# EAGLE board atmegademo1 (EAGLE 7.0.0)
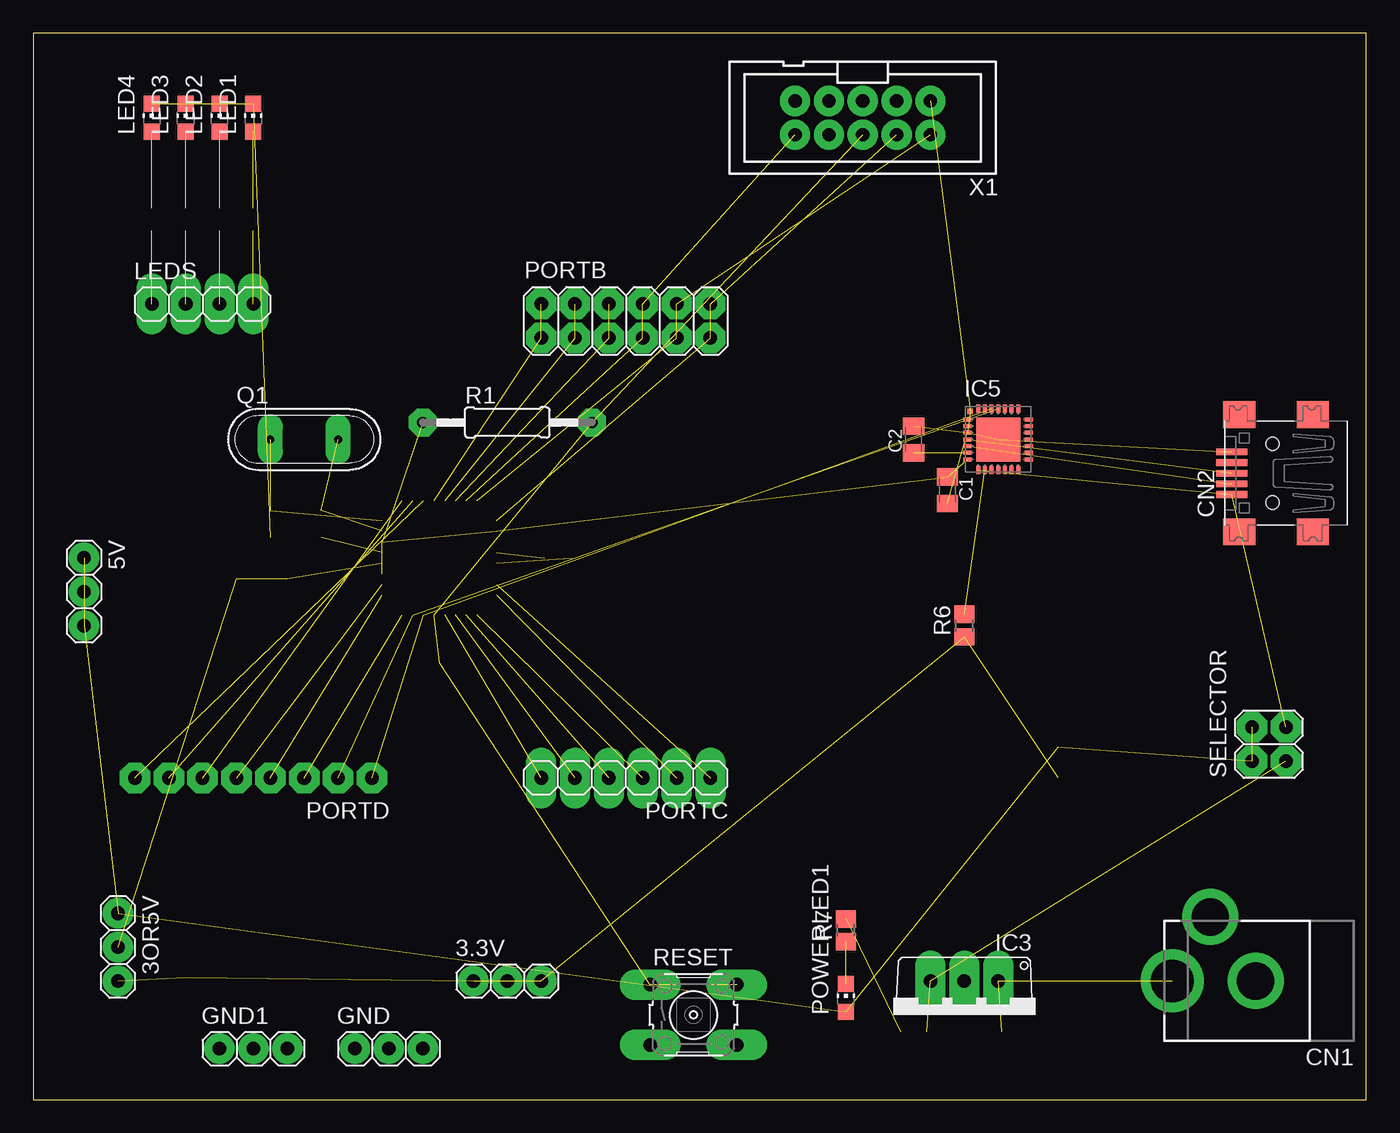
[diagram p0: board, top side]
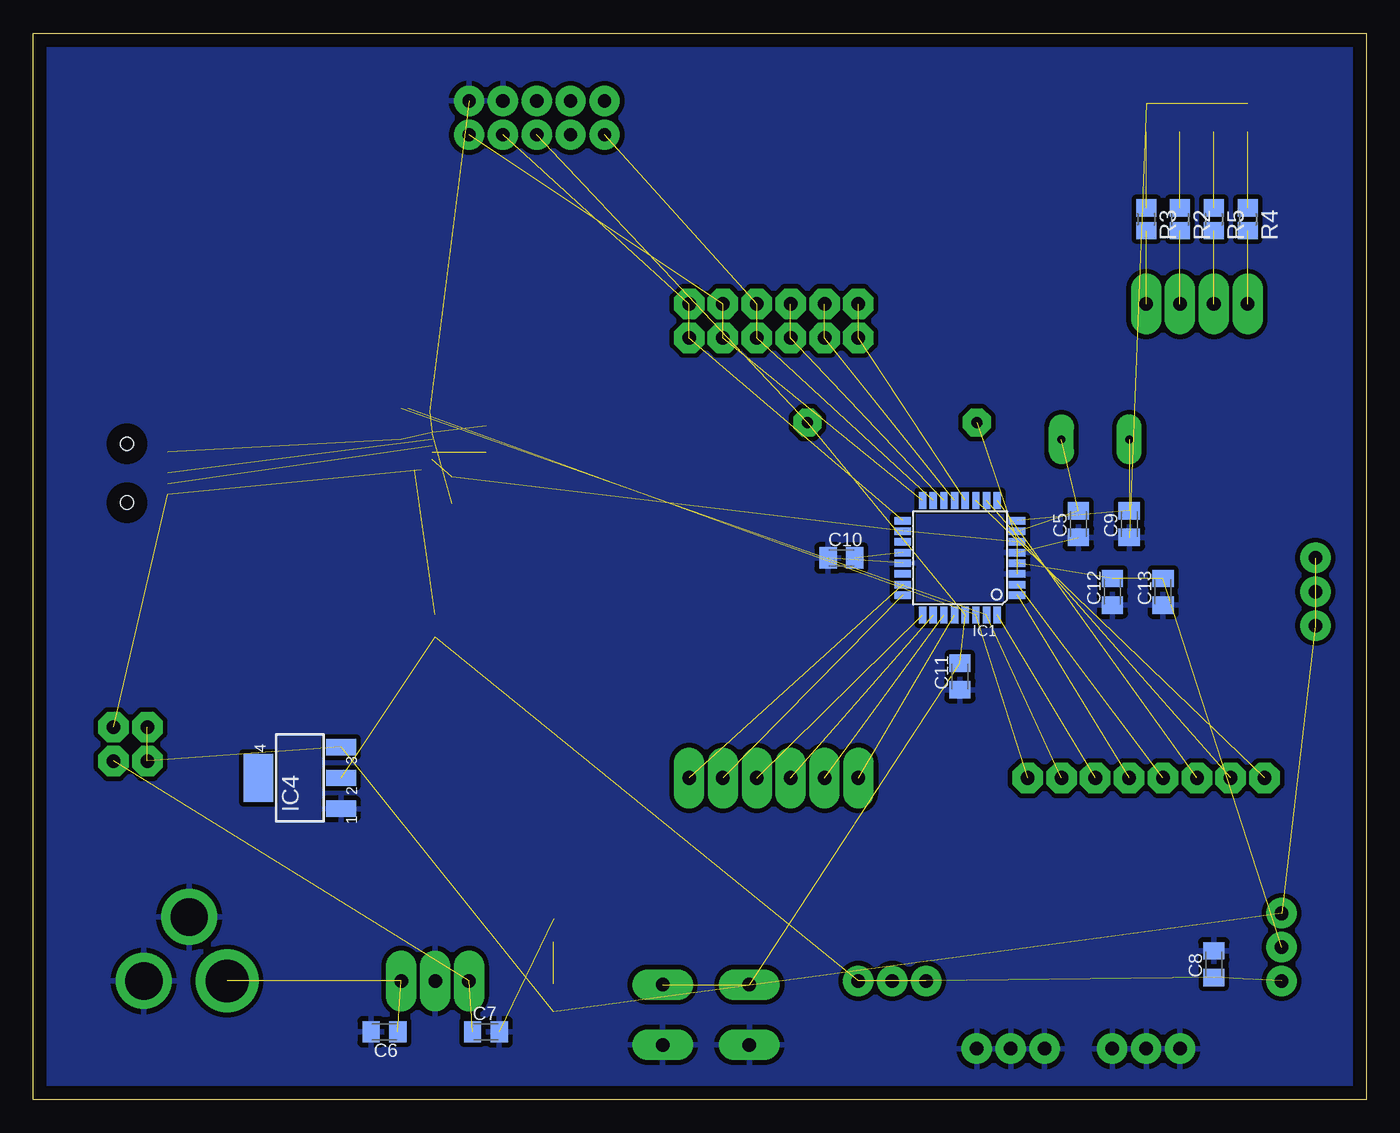
[diagram p1: board, bottom side, seen from below]

Size 100 x 80 mm. Coordinates in mm from the lower left corner, seen from the top.
Outline: 0,0 100,0 100,80 0,80 0,0
Copper layers (1*16): Top 0.035mm / dielectric 1.5mm / Bottom 0.035mm
Design rules "default": minimum track width 10mil, minimum drill 32mil, track to track 12mil, track to pad 12mil, pad to pad 12mil, via to via 12mil, smd to smd 8mil, copper to edge 40mil, drill to drill 40mil, minimum pad ring 25mil, minimum via ring 12mil, stop-mask expansion 4mil, vias tented up to drill 0mil, thermal gap 15mil
Net classes: 0 default: clearance 0.355 mm

## Footprints (pad centres in the part's own frame; a part is rotated, then mirrored left to right if it is on the bottom)
1X03 = drill 1.016: 1 -2.54,0; 2 0,0; 3 2.54,0
C0805K = smd 1.3 x 1.6: 1 -1,0; 2 1,0
DCJACK_2MM_PTH = drill 2.8: GND 0,7.35; GNDBREAK 4.8,10.75 | drill 3.2: PWR 0,13.6
USB-MINIB = smd 0.5 x 2.308: D+ 0,4.064; D- -0.8,4.064; GND 1.6,4.064; ID 0.8,4.064; VBUS -1.6,4.064 | smd 2 x 2.4: GND1 -4.4,-2; GND2 -4.4,3.5; GND3 4.4,3.5; GND4 4.4,-2 | hole 1: -2.2,1; 2.2,1
TQFP32-08 = smd 1.27 x 0.559: 1 -4.293,2.8; 2 -4.293,2; 3 -4.293,1.2; 4 -4.293,0.4; 5 -4.293,-0.4; 6 -4.293,-1.2; 7 -4.293,-2; 8 -4.293,-2.8; 17 4.293,-2.8; 18 4.293,-2; 19 4.293,-1.2; 20 4.293,-0.4; 21 4.293,0.4; 22 4.293,1.2; 23 4.293,2; 24 4.293,2.8 | smd 0.559 x 1.27: 9 -2.8,-4.293; 10 -2,-4.293; 11 -1.2,-4.293; 12 -0.4,-4.293; 13 0.4,-4.293; 14 1.2,-4.293; 15 2,-4.293; 16 2.8,-4.293; 25 2.8,4.293; 26 2,4.293; 27 1.2,4.293; 28 0.4,4.293; 29 -0.4,4.293; 30 -1.2,4.293; 31 -2,4.293; 32 -2.8,4.293
TO220V = drill 1.016 long: 1 -2.54,-2.54; 2 0,-2.54; 3 2.54,-2.54
SOT223 = smd 1.219 x 2.235: 1 -2.311,-3.099; 2 0,-3.099; 3 2.311,-3.099 | smd 3.6 x 2.2: 4 0,3.099
MLP28 = smd 0.6 x 0.3: 1 -2.3,1.5; 2 -2.3,1; 3 -2.3,0.5; 4 -2.3,0; 5 -2.3,-0.5; 6 -2.3,-1; 7 -2.3,-1.5; 15 2.3,-1.5; 16 2.3,-1; 17 2.3,-0.5; 18 2.3,0; 19 2.3,0.5; 20 2.3,1; 21 2.3,1.5 | smd 0.3 x 0.6: 8 -1.5,-2.3; 9 -1,-2.3; 10 -0.5,-2.3; 11 0,-2.3; 12 0.5,-2.3; 13 1,-2.3; 14 1.5,-2.3; 22 1.5,2.3; 23 1,2.3; 24 0.5,2.3; 25 0,2.3; 26 -0.5,2.3; 27 -1,2.3; 28 -1.5,2.3 | smd 3.3 x 3.3: EXP 0,0 | smd 0.435 x 0.435: M -2.103,2.103
CHIP-LED0805 = smd 1.2 x 1.2: A 0,-1.05; C 0,1.05
1X04 = drill 1.016 long: 1 -3.81,0; 2 -1.27,0; 3 1.27,0; 4 3.81,0
2X06 = drill 1.016 octagon: 1 -6.35,-1.27; 2 -6.35,1.27; 3 -3.81,-1.27; 4 -3.81,1.27; 5 -1.27,-1.27; 6 -1.27,1.27; 7 1.27,-1.27; 8 1.27,1.27; 9 3.81,-1.27; 10 3.81,1.27; 11 6.35,-1.27; 12 6.35,1.27
1X06 = drill 1.016 long: 1 -6.35,0; 2 -3.81,0; 3 -1.27,0; 4 1.27,0; 5 3.81,0; 6 6.35,0
1X08-CLEANBIG = drill 1.016 pad 1.778 octagon: 1 -8.89,0; 2 -6.35,0; 3 -3.81,0; 4 -1.27,0; 5 1.27,0; 6 3.81,0; 7 6.35,0; 8 8.89,0
QS = drill 0.61 long: 1 -2.54,0; 2 2.54,0
0207/12 = drill 0.813 octagon: 1 -6.35,0; 2 6.35,0
R0805 = smd 1.3 x 1.5: 1 -0.85,0; 2 0.85,0
B3F-10XX = drill 1.016 long: 1 -3.251,2.261; 2 3.251,2.261; 3 -3.251,-2.261; 4 3.251,-2.261
2X02 = drill 1.016 octagon: 1 -1.27,-1.27; 2 -1.27,1.27; 3 1.27,-1.27; 4 1.27,1.27
PAK100/2500-10 = drill 1 pad 1.422: 1 -5.08,-1.27; 2 -5.08,1.27; 3 -2.54,-1.27; 4 -2.54,1.27; 5 0,-1.27; 6 0,1.27; 7 2.54,-1.27; 8 2.54,1.27; 9 5.08,-1.27; 10 5.08,1.27

## Placement (x,y rotation side)
3.3V  [1X03]  35.56,8.89 0 top
3OR5V  [1X03]  6.35,11.43 270 top
5V  [1X03]  3.81,38.1 270 top
C1  1 uF  [C0805K]  68.58,45.72 270 top
C2  0.1 uF  [C0805K]  66.04,49.53 90 top
C5  22pf  [C0805K]  21.59,43.18 90 bottom
C6  0.33uF  [C0805K]  73.66,5.08 180 bottom
C7  0.1uF  [C0805K]  66.04,5.08 0 bottom
C8  0.1uF  [C0805K]  11.43,10.16 90 bottom
C9  22pf  [C0805K]  17.78,43.18 90 bottom
C10  100n  [C0805K]  39.37,40.64 0 bottom
C11  100 uF  [C0805K]  30.48,31.75 90 bottom
C12  47uF  [C0805K]  19.05,38.1 90 bottom
C13  100n  [C0805K]  15.24,38.1 90 bottom
CN1  [DCJACK_2MM_PTH]  99.06,8.89 90 top
CN2  [USB-MINIB]  93.98,46.99 90 top
GND  [1X03]  26.67,3.81 0 top
GND1  [1X03]  16.51,3.81 0 top
IC1  MEGA8-AI  [TQFP32-08]  30.48,40.64 180 bottom
IC3  7805TV  [TO220V]  69.85,6.35 180 top
IC4  317EMP  [SOT223]  80.01,24.13 90 bottom
IC5  CP2102  [MLP28]  72.39,49.53 0 top
LED1  [CHIP-LED0805]  16.51,73.66 0 top
LED2  [CHIP-LED0805]  13.97,73.66 0 top
LED3  [CHIP-LED0805]  11.43,73.66 0 top
LED4  [CHIP-LED0805]  8.89,73.66 0 top
LEDS  [1X04]  12.7,59.69 0 top
PORTB  [2X06]  44.45,58.42 0 top
PORTC  [1X06]  44.45,24.13 180 top
PORTD  [1X08-CLEANBIG]  16.51,24.13 180 top
POWERLED1  [CHIP-LED0805]  60.96,7.62 0 top
Q1  [QS]  20.32,49.53 0 top
R1  10k  [0207/12]  35.56,50.8 0 top
R2  [R0805]  13.97,66.04 270 bottom
R3  [R0805]  16.51,66.04 270 bottom
R4  [R0805]  8.89,66.04 270 bottom
R5  [R0805]  11.43,66.04 270 bottom
R6  4.7k  [R0805]  69.85,35.56 90 top
R7  [R0805]  60.96,12.7 90 top
RESET  [B3F-10XX]  49.53,6.35 0 top
SELECTOR  [2X02]  92.71,26.67 90 top
X1  2510-  [PAK100/2500-10]  62.23,73.66 180 top

## Library data of the parts
3.3V 3OR5V 5V CN1 CN2 GND GND1 PORTD = adafruit
C1 C2 C5-C13 R1-R7 = resistor
IC1 = atmel; MPN: ATMEGA8-16AU; OC_FARNELL: 9171371; OC_NEWARK: 73M8863
IC3 IC4 = linear
IC5 = silabs; MF: FARNELL; MPN: CP2102-GM; OC_FARNELL: 9282130; OC_NEWARK: 30K5635
LED1-LED4 POWERLED1 = led
LEDS PORTB PORTC SELECTOR = pinhead
Q1 = special
RESET = switch-omron; MPN: B3F-1000; OC_FARNELL: 176432; OC_NEWARK: 36M3542
X1 = con-3m; MF: 3M; MPN: 2510-6002UB; OC_FARNELL: 9838244; OC_NEWARK: 46F4725

## Nets
+3V3: 3.3V.1 3.3V.2 3.3V.3 3OR5V.3 C8.1 IC4.2 R6.1
+5V: 3OR5V.1 5V.1 5V.2 5V.3 IC4.3 POWERLED1.A SELECTOR.2 SELECTOR.4
D+: CN2.D+ IC5.4
D-: CN2.D- IC5.5
GND: C1.2 C2.2 C5.1 C6.2 C7.2 C8.2 C9.1 C10.1 C11.1 C12.1 C13.1 CN1.GND CN1.GNDBREAK CN2.GND GND1.1 GND1.2 GND1.3 GND.1 GND.2 GND.3 IC1.3 IC1.5 IC1.21 IC3.2 IC4.1 IC5.3 IC5.EXP IC5.M LED1.C LED2.C LED3.C LED4.C R7.2 RESET.3 RESET.4 X1.1 X1.3
MISO: IC1.16 PORTB.9 PORTB.10 X1.2
MOSI: IC1.15 PORTB.7 PORTB.8 X1.10
N$2: POWERLED1.C R7.1
N$3: C2.1 IC5.6
N$4: IC5.9 R6.2
N$7: LEDS.4 R3.2
N$10: LEDS.3 R2.2
N$11: IC1.32 PORTD.3
N$12: IC1.1 PORTD.4
N$13: IC1.2 PORTD.5
N$14: C6.1 CN1.PWR IC3.1
N$15: IC1.9 PORTD.6
N$16: IC1.23 PORTC.1
N$17: IC1.10 PORTD.7
N$18: IC1.11 PORTD.8
N$19: IC1.24 PORTC.2
N$20: IC1.25 PORTC.3
N$21: IC1.26 PORTC.4
N$22: LEDS.2 R5.2
N$23: LED1.A R3.1
N$24: LED2.A R2.1
N$26: C10.2 IC1.20
N$27: C5.2 IC1.7 Q1.2
N$28: LED4.A R4.1
N$29: LED3.A R5.1
N$30: C9.2 IC1.8 Q1.1
N$31: IC1.13 PORTB.3 PORTB.4
N$32: IC1.14 PORTB.5 PORTB.6
N$33: IC1.12 PORTB.1 PORTB.2
N$36: LEDS.1 R4.2
REGOUT: C7.1 IC3.3 SELECTOR.1
RESET: C11.2 IC1.29 R1.2 RESET.1 RESET.2 X1.6
RX: IC1.30 IC5.26 PORTD.1
SCK: IC1.17 PORTB.11 PORTB.12 X1.4
SCL: IC1.28 PORTC.6
SDA: IC1.27 PORTC.5
TX: IC1.31 IC5.25 PORTD.2
USBVCC: CN2.VBUS IC5.8 SELECTOR.3
VCC: 3OR5V.2 C1.1 C12.2 C13.2 IC1.4 IC1.6 IC1.18 IC5.7 R1.1

## Tracks (layer width: path | path; a pad name or v marks a point on that pad's centre or on a via)
+3V3  (6 unrouted)
+5V  (7 unrouted)
D+  (1 unrouted)
D-  (1 unrouted)
GND  (14 unrouted)
  pour Bottom: -2.54,85.09 102.87,85.09 102.87,-5.08 -2.54,-5.08
MISO  (3 unrouted)
MOSI  (3 unrouted)
N$2  (1 unrouted)
N$3  (1 unrouted)
N$4  (1 unrouted)
N$7  (1 unrouted)
N$10  (1 unrouted)
N$11  (1 unrouted)
N$12  (1 unrouted)
N$13  (1 unrouted)
N$14  (2 unrouted)
N$15  (1 unrouted)
N$16  (1 unrouted)
N$17  (1 unrouted)
N$18  (1 unrouted)
N$19  (1 unrouted)
N$20  (1 unrouted)
N$21  (1 unrouted)
N$22  (1 unrouted)
N$23  (1 unrouted)
N$24  (1 unrouted)
N$26  (1 unrouted)
N$27  (2 unrouted)
N$28  (1 unrouted)
N$29  (1 unrouted)
N$30  (2 unrouted)
N$31  (2 unrouted)
N$32  (2 unrouted)
N$33  (2 unrouted)
N$36  (1 unrouted)
REGOUT  (2 unrouted)
RESET  (5 unrouted)
RX  (2 unrouted)
SCK  (3 unrouted)
SCL  (1 unrouted)
SDA  (1 unrouted)
TX  (2 unrouted)
USBVCC  (2 unrouted)
VCC  (8 unrouted)